# Altium PCB 2023-04-28_PIFHomework_LM2596_ThangHo_V1-01.PcbDoc
Units mil, origin at the board's own origin, x right, y up, seen from the top; angles counter-clockwise.
Board outline 1952.43 x 1244.62 mil, 2 copper layers (Top Layer, Bottom Layer); 10 components, 6 nets, 29 pads, 0 vias.
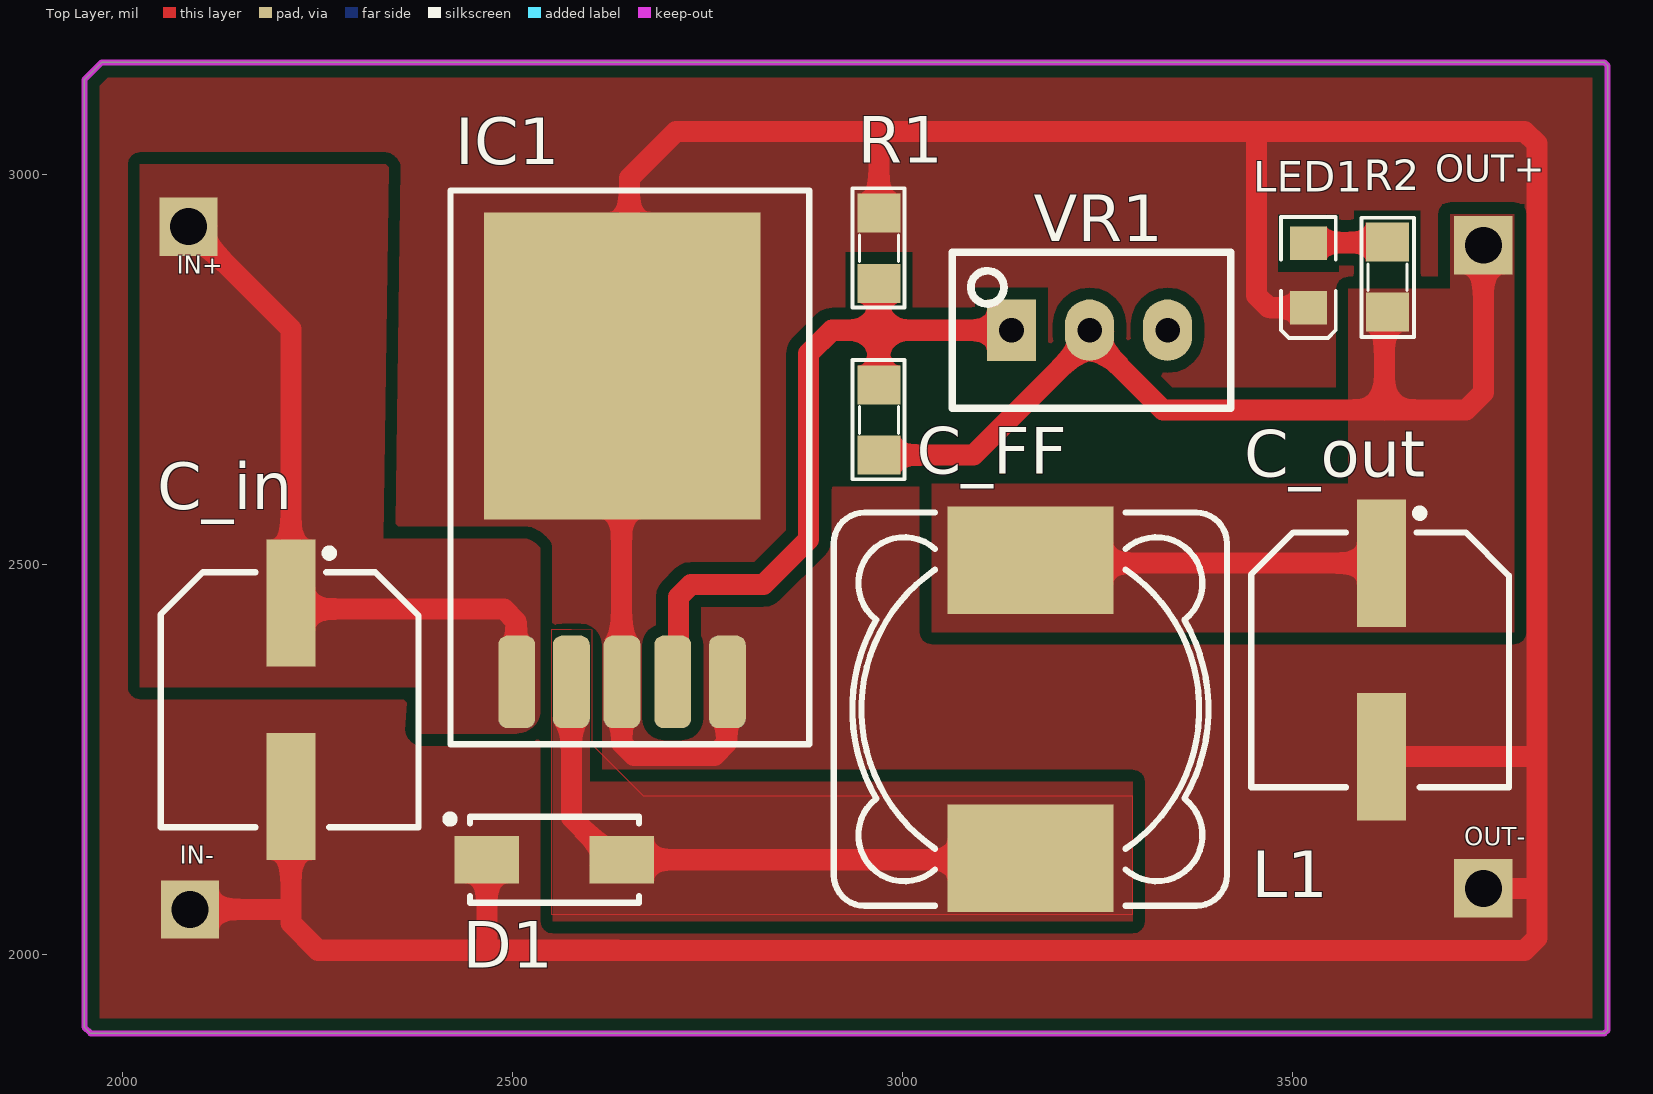
[diagram p0: Top Layer view]
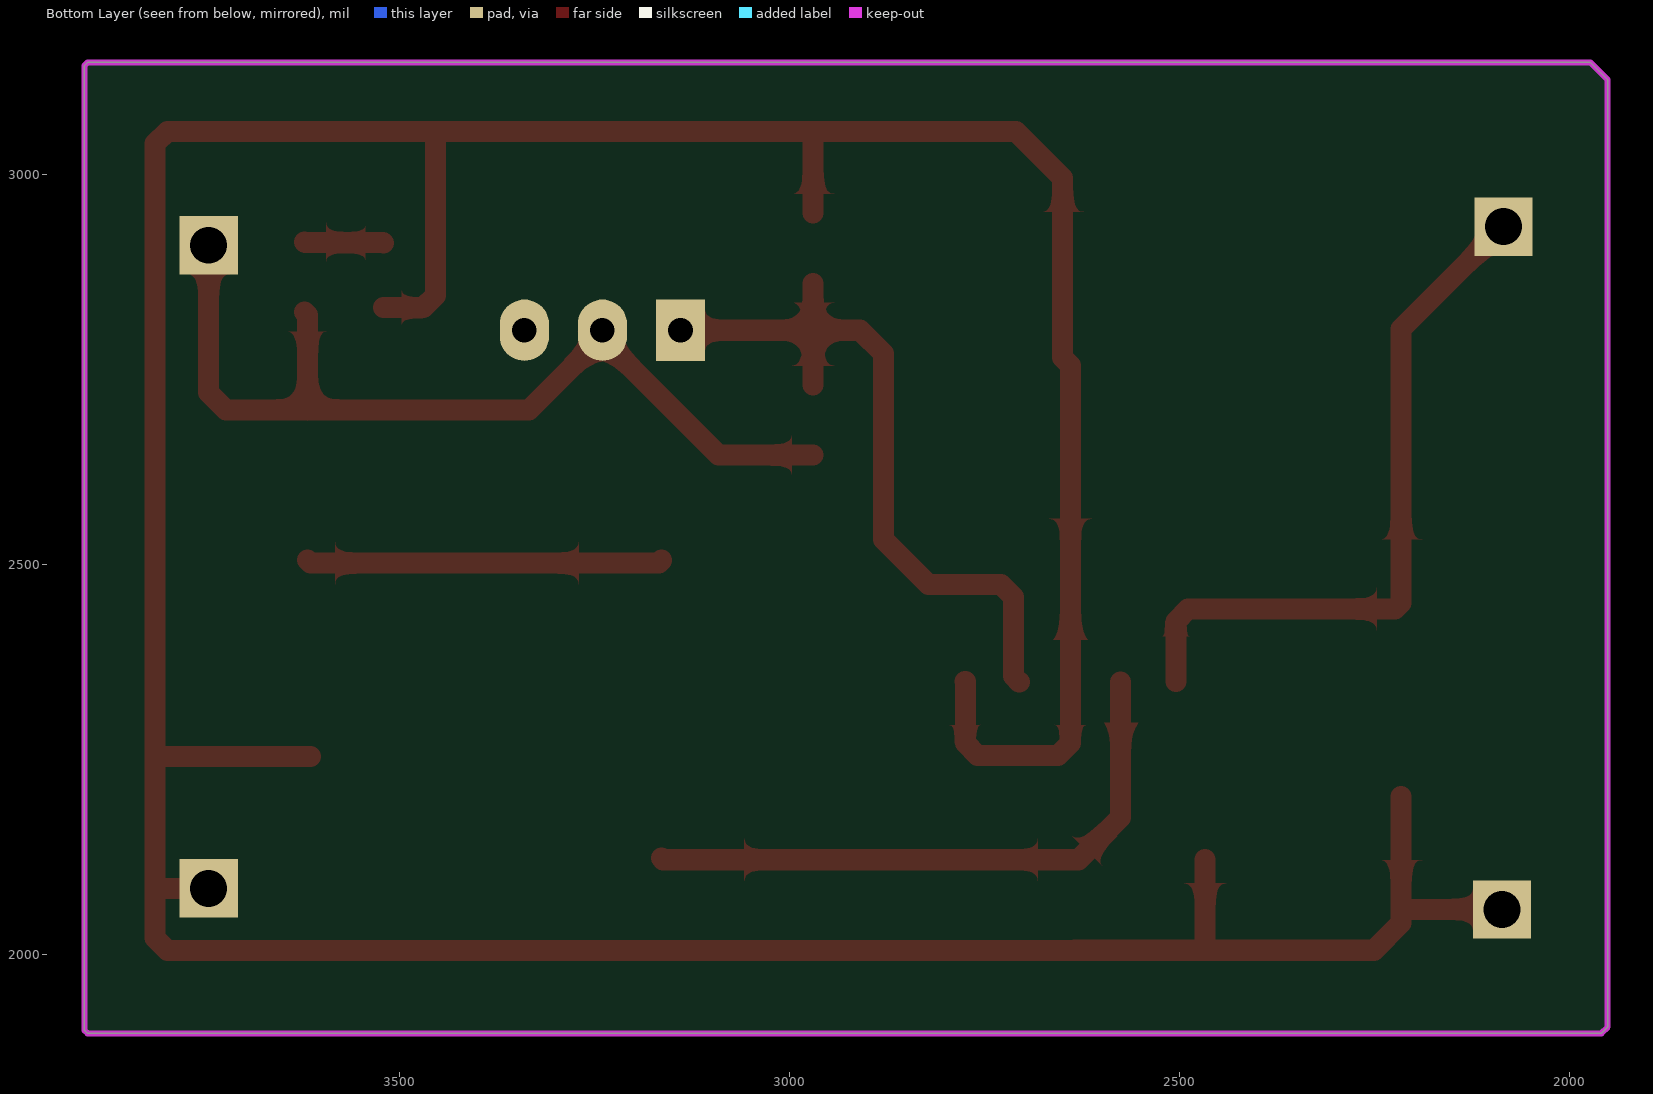
[diagram p1: Bottom Layer view, seen from below]
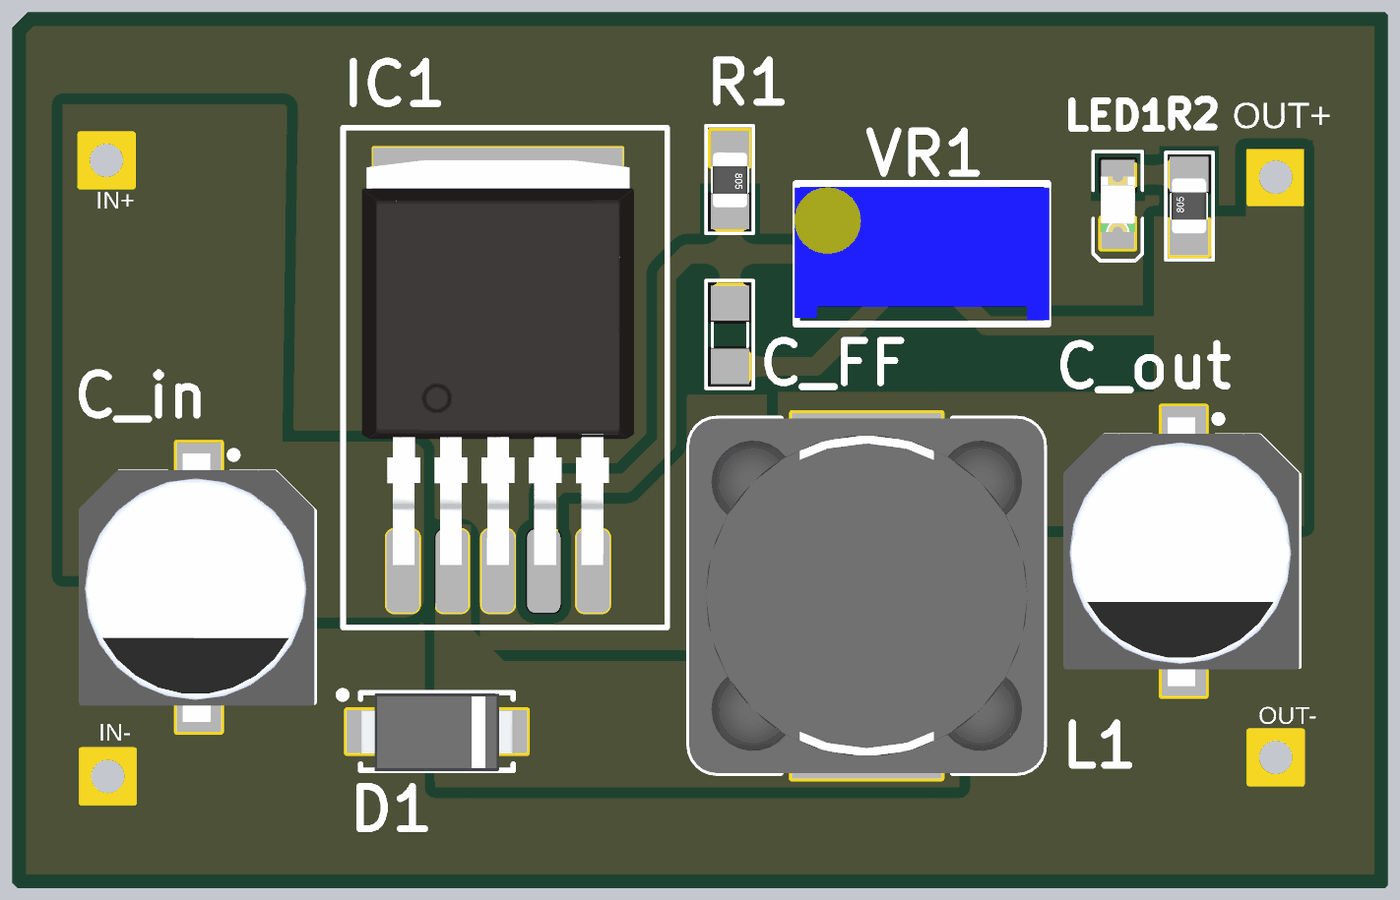
[diagram p2: 3D render of the assembled board from above, using the file's embedded part models]

## Layer stack, top to bottom
Top Solder: solder mask 0.4, Solder Resist, Dk 3.5
Top Layer: signal copper 1.4
Dielectric 1: dielectric 12.6, FR-4, Dk 4.8
Bottom Layer: signal copper 1.4
Bottom Solder: solder mask 0.4, Solder Resist, Dk 3.5

## Board outline
1951.59,1906.61 1959.55,1898.65 3900.04,1898.65 3904.02,1902.63 3904.02,3139.3 3900.05,3143.27 1973.46,3143.27 1951.59,3121.4

## Design rules (kind name [scope] priority, off if disabled: settings)
Clearance [All] p1: gap=15 ignorepadtopadclearanceinfootprint=FALSE
PolygonConnect PolygonConnect_9 [All vs IsNamedPolygon('NETD1_2_L01_P001')] p1: thpad.connectstyle=Direct thpad.reliefconductorwidth=10 thpad.reliefentries=4 thpad.polygonreliefangle="90 Angle" thpad.airgapwidth=10 smdpad.connectstyle=Direct smdpad.reliefconductorwidth=10 smdpad.reliefentries=4 smdpad.polygonreliefangle="90 Angle" smdpad.airgapwidth=10 via.connectstyle=Relief via.reliefconductorwidth=10 via.reliefentries=4 via.polygonreliefangle="90 Angle" via.airgapwidth=10
PolygonConnect PolygonConnect_8 [All vs IsNamedPolygon('NETD1_2_L01_P000')] p2: thpad.connectstyle=Direct thpad.reliefconductorwidth=10 thpad.reliefentries=4 thpad.polygonreliefangle="90 Angle" thpad.airgapwidth=10 smdpad.connectstyle=Direct smdpad.reliefconductorwidth=10 smdpad.reliefentries=4 smdpad.polygonreliefangle="90 Angle" smdpad.airgapwidth=10 via.connectstyle=Relief via.reliefconductorwidth=10 via.reliefentries=4 via.polygonreliefangle="90 Angle" via.airgapwidth=10
PolygonConnect PolygonConnect_7 [All vs IsNamedPolygon('NONET_L01_P003')] p3: thpad.connectstyle=Direct thpad.reliefconductorwidth=10 thpad.reliefentries=4 thpad.polygonreliefangle="90 Angle" thpad.airgapwidth=10 smdpad.connectstyle=Direct smdpad.reliefconductorwidth=10 smdpad.reliefentries=4 smdpad.polygonreliefangle="90 Angle" smdpad.airgapwidth=10 via.connectstyle=Relief via.reliefconductorwidth=10 via.reliefentries=4 via.polygonreliefangle="90 Angle" via.airgapwidth=10
PolygonConnect PolygonConnect_6 [All vs IsNamedPolygon('NONET_L01_P002')] p4: thpad.connectstyle=Direct thpad.reliefconductorwidth=10 thpad.reliefentries=4 thpad.polygonreliefangle="90 Angle" thpad.airgapwidth=10 smdpad.connectstyle=Direct smdpad.reliefconductorwidth=10 smdpad.reliefentries=4 smdpad.polygonreliefangle="90 Angle" smdpad.airgapwidth=10 via.connectstyle=Relief via.reliefconductorwidth=10 via.reliefentries=4 via.polygonreliefangle="90 Angle" via.airgapwidth=10
PolygonConnect PolygonConnect_5 [All vs IsNamedPolygon('NETC_FF_2_L01_P001')] p5: thpad.connectstyle=Direct thpad.reliefconductorwidth=10 thpad.reliefentries=4 thpad.polygonreliefangle="90 Angle" thpad.airgapwidth=10 smdpad.connectstyle=Direct smdpad.reliefconductorwidth=10 smdpad.reliefentries=4 smdpad.polygonreliefangle="90 Angle" smdpad.airgapwidth=10 via.connectstyle=Relief via.reliefconductorwidth=10 via.reliefentries=4 via.polygonreliefangle="90 Angle" via.airgapwidth=10
PolygonConnect PolygonConnect_4 [All vs IsNamedPolygon('NETD1_1_L01_P000')] p6: thpad.connectstyle=Direct thpad.reliefconductorwidth=10 thpad.reliefentries=4 thpad.polygonreliefangle="90 Angle" thpad.airgapwidth=10 smdpad.connectstyle=Direct smdpad.reliefconductorwidth=10 smdpad.reliefentries=4 smdpad.polygonreliefangle="90 Angle" smdpad.airgapwidth=10 via.connectstyle=Relief via.reliefconductorwidth=10 via.reliefentries=4 via.polygonreliefangle="90 Angle" via.airgapwidth=10
PolygonConnect PolygonConnect_3 [All vs IsNamedPolygon('NETD1_1_L01_P000')] p7: thpad.connectstyle=Direct thpad.reliefconductorwidth=10 thpad.reliefentries=4 thpad.polygonreliefangle="90 Angle" thpad.airgapwidth=10 smdpad.connectstyle=Direct smdpad.reliefconductorwidth=10 smdpad.reliefentries=4 smdpad.polygonreliefangle="90 Angle" smdpad.airgapwidth=10 via.connectstyle=Relief via.reliefconductorwidth=10 via.reliefentries=4 via.polygonreliefangle="90 Angle" via.airgapwidth=10
PolygonConnect PolygonConnect_2 [All vs IsNamedPolygon('NETD1_1_L01_P000')] p8: thpad.connectstyle=Direct thpad.reliefconductorwidth=10 thpad.reliefentries=4 thpad.polygonreliefangle="90 Angle" thpad.airgapwidth=10 smdpad.connectstyle=Direct smdpad.reliefconductorwidth=10 smdpad.reliefentries=4 smdpad.polygonreliefangle="90 Angle" smdpad.airgapwidth=10 via.connectstyle=Relief via.reliefconductorwidth=10 via.reliefentries=4 via.polygonreliefangle="90 Angle" via.airgapwidth=10
PolygonConnect PolygonConnect_1 [All vs IsNamedPolygon('GND_L01_P003')] p9: thpad.connectstyle=Direct thpad.reliefconductorwidth=10 thpad.reliefentries=4 thpad.polygonreliefangle="90 Angle" thpad.airgapwidth=10 smdpad.connectstyle=Direct smdpad.reliefconductorwidth=10 smdpad.reliefentries=4 smdpad.polygonreliefangle="90 Angle" smdpad.airgapwidth=10 via.connectstyle=Relief via.reliefconductorwidth=10 via.reliefentries=4 via.polygonreliefangle="90 Angle" via.airgapwidth=10
PolygonConnect [All] p10: connectstyle=Relief reliefconductorwidth=10 reliefentries=4 polygonreliefangle="90 Angle" airgapwidth=10
RoomDefinition LM2596 [InComponentClass('LM2596')] p1: confinementstyle=ConfineIn formatcopy=TRUE lockcomponents=FALSE outline 0,0 2000,0 2000,1000 0,1000
RoutingVias [All] p1: holewidth=31.5 width=59.06 viastyle="Through Hole" minholewidth=31.5 minwidth=59.06 maxholewidth=31.5 maxwidth=59.06
SolderMaskExpansion [All] p1: expansion=4 istentingtop=FALSE
Width [All] p1: maxlimit=27 minlimit=10 preferedwidth=20
30 further rules are at their usual default settings.

## Components (designator, comment, footprint, x,y, rotation, side; value= is the part's Value field where it differs from the comment)
C_FF "22nF" CAP-0805 2970,2685 r270 top
C_in "100uF" CAP-ALU 2215.63,2326.71 r270 top
C_out "220uF" CAP-ALU 3613.5,2377.9 r270 top
D1 "D Schottky" SS34 2554,2121.22 r0 top
IC1 "LM2596" LM2596 2640.75,2679.25 r0 top
L1 "68uH" INDUCTOR 3166.14,2315.19 r90 top
LED1 "" LED-0805 3520.6,2870.3 r270 top
R1 "1k" RES-SMD-0805 2970,2905 r270 top
R2 "330" RES-SMD-0805 3621.7,2868.14 r90 top
VR1 "1k" Varistor 3240,2800 r0 top

## Footprints (in the part's own frame and the unit in brackets; to place one, negate y for a bottom-side part, rotate by r counter-clockwise, add the part's x,y. Pads: shape width x height; smd on the part's side, far side on the other; paste and mask are expansions set on the pad)
CAP-0805 [mil]
  rect 50x55 smd: 1(-45,0) 2(45,0)
  silkscreen extent -77,-34 76,33, body extent -39,-25 39,25, height 31
CAP-ALU [mm]
  rect 4.15x1.6 smd: 1(-3.14,0.015) 2(3.16,0.015)
  silkscreen extent -4.89,-4.22 4.16,4.17, body extent -4.82,-4.32 4.88,4.18, height 10.5
INDUCTOR [mm]
  rect 3.5x5.4 smd: 1(-4.875,0.051) 2(4.825,0.051)
  silkscreen extent -6.43,-6.35 6.37,6.45, body extent -6.43,-6.35 6.37,6.45, height 8
LED-0805 [mm]
  rect 1.1x1.2 smd: 1(-1.05,0) 2(1.05,0)
  silkscreen extent -1.91,-0.89 2.03,0.89, body extent -1,-0.63 1,0.62, height 0.68
LM2596 [mm]
  rrect50% 1.2x3.015 smd mask+0.05: 1(-3.429,-8.382) 2(-1.651,-8.382) 3(0,-8.382) 4(1.651,-8.382) 5(3.429,-8.382)
  rect 9x10 smd mask+0.05: 3(0,1.905)
  silkscreen extent -5.59,-10.41 6.1,7.62, body extent -4.91,-8.16 4.91,6.44, height 4.22
RES-SMD-0805 [mil]
  rect 50x55 smd: 1(-45,0) 2(45,0)
  silkscreen extent -77,-34 76,33, body extent -39,-25 39,25, height 31
SS34 [mm] "DO-214-AC/SMA Molded Diode, Body 5.3x2.6mm, IPC Medium Density"
  rect 2.1x1.55 smd: 1(-2.2,0) 2(2.2,0)
  silkscreen extent -3.52,-1.4 2.75,1.45, body extent -2.75,-1.42 2.75,1.38, height 2.3
Varistor [mm]
  rect 1.6x2 hole 0.8: 1(-2.54,0)
  oval 1.6x2 hole 0.8: 2(0,0) 3(2.54,0)
  silkscreen extent -4.47,-2.54 4.6,2.54, body extent -4.54,-2.4 4.66,2.4, height 12.02

## Part data
C_FF: library part CAP-SMD-0805
C_in C_out: library part CAP-ALUM
D1: "Schottky Diode", Code_JEDEC=DO-214-AA, LatestRevisionDate=17-Jul-2002, LatestRevisionNote="Re-released for DXP Platform.", PackageDescription="DO-214-AA/SMB; 2 C-Bend Leads; Body 5.3 x 3.6 mm, inc. leads (LxW)", PackageReference=SMB, Published=8-Jun-2000, Publisher="Altium Limited"
L1: library part INDUCTOR
LED1: library part LED-0805
R1 R2: library part RES-SMD-0805
VR1: library part Varistor

## Free pads (board coordinates)
  rect 74.8x74.8 hole 47.24: 1(2084.92,2932.83) 2(2086.82,2057.52) 3(3744.79,2909.02) 4(3744.79,2084.5)

## Nets (pads, with @x,y where several pads share a name; then routed paths per layer and width w, separated by ;. In a path a pad name is that pad's centre, name@x,y a point inside that pad or via, vN(x,y) a via of type N, cw(c..) or ccw(c..) an arc to the next point about the centre after c; other vN are vias at no path point)
Feedback: C_FF.1 IC1.4 R1.2 VR1.1 | length 949.9
  Top Layer w27: IC1.4 2713.04,2356.55 2713.04,2458.2 2728.86,2474.02 2822.04,2474.02 2880,2531.98 2880,2627.5 2880,2770 2910,2800 2970,2800 ; C_FF.1 2970,2800 ; R1.2 2970,2800 ; VR1.1 2970,2800
GND: C_in.2 C_out.2 D1.1 IC1.3 IC1.5 LED1.2 pad.2 pad.4 R1.1 | length 5860.2
  Top Layer w27: pad.2 2213.92,2057.52 2216.24,2059.84 ; C_in.2 2216.24,2059.84 ; D1.1 2467.39,2006.17 2468.36,2005.2 ; 2516,2005.55 2515.65,2005.2 ; IC1.5@2775,2350 2774.85,2349.85 2774.85,2270.82 2759.04,2255 2655.96,2255 2640.15,2270.82 2640.15,2349.85 2640,2350 2640,2755 2650,2765 2650,2995 2710,3055 2975,3055 ; R1.1 2970,3050 2975,3055 ; LED1.2 3469.73,2828.96 3453.91,2844.78 3453.91,3047.31 3446.22,3055 ; C_out.2 3807.16,2253.49 3813.31,2247.34 ; pad.4 3813.31,2084.26 ; 2216.24,2059.84 2216.24,2039.95 2250.99,2005.2 2468.36,2005.2 ; 2468.36,2005.2 2515.65,2005.2 ; 2515.65,2005.2 2634.8,2005.2 2635,2005 3797.49,2005 3813.31,2020.82 3813.31,2084.26 ; 2975,3055 3340,3055 3446.22,3055 ; 3446.22,3055 3797.49,3055 3813.31,3039.18 3813.31,2247.34 ; 3813.31,2084.26 3813.31,2247.34
NetC_FF_2: C_FF.2 C_out.1 L1.2 pad.3 R2.1 VR1.2 | length 1680.1
  Top Layer w27: C_FF.2 3091.17,2640 3240,2788.83 VR1.2@3240,2792.13 ; L1.2 3167.75,2501.52 C_out.1 C_out.1@3617.91,2505.32 ; VR1.2 VR1.2@3240,2792.13 ; R2.1 3617.91,2819.34 3617.91,2697.78 ; pad.3@3736.69,2900.92 pad.3 3744.79,2720.07 3722.5,2697.78 3617.91,2697.78 ; VR1.2@3240,2792.13 3334.35,2697.78 3617.91,2697.78
NetD1_2: D1.2 IC1.2 L1.1 | length 785.6
  Top Layer w27: IC1.2 2575.75,2175.26 2629.79,2121.22 D1.2 3162.11,2121.22 L1.1
NetLED1_1: LED1.1 R2.2 | length 101.7
  Top Layer w27: LED1.1 3521.35,2912.39 3620.95,2912.39 R2.2
VCC: C_in.1 IC1.1 pad.1 | length 912.2
  Top Layer w27: pad.1 2216.24,2801.51 C_in.1 2223.94,2442.63 2489.18,2442.63 2505,2426.81 IC1.1@2505,2350
pads on no net: VR1.3

## Polygon pours and split planes (outlines as drawn)
VCC on Top Layer "VCC_L01_P003" (solid, remove dead copper, pour order 3): 2471.9,2282.97 2505.94,2282.97 ccw(c2503.41,2319.51) 2523.77,2289.06 ccw(c2506.1,2313.15) 2535.63,2308.62 2535.63,2333.94 2535.63,2369.35 2535.63,2521.25 ccw(c2504.63,2495.31) 2519.15,2533.03 2334.61,2533.03 2341.44,3012.56 2022.77,3012.56 2022.77,2342.35 2381.69,2341.64 2378.1,2282.97
GND on Top Layer "GND_L01_P005" (solid, remove dead copper, pour order 5): 1951.59,1906.61 1959.55,1898.65 3900.04,1898.65 3904.02,1902.63 3904.02,3139.3 3900.05,3143.27 1973.46,3143.27 1951.59,3121.4
NetD1_2 on Top Layer "NETD1_2_L01_P004" (solid, remove dead copper, pour order 4): 2551.83,2303.88 2551.83,2042.08 3295.58,2042.08 3295.58,2221.49 2599.52,2221.49 2599.52,2303.88
NetC_FF_2 on Top Layer "NETC_FF_2_L01_P002" (solid, remove dead copper, pour order 2): 3702.31,2853.22 3702.31,2948.97 3784.87,2948.97 3784.87,2413.05 3037.77,2413.05 3037.77,2603.43 3571.5,2603.43 3571.5,2853.22
NetD1_2 on Top Layer "NONET_L01_P000" (solid, remove dead copper, shelved, pour order 0): 2550.03,2415.93 2550.03,2051.08 3295.58,2051.08 3295.58,2202.45 2668.57,2202.45 2602.37,2268.65 2602.37,2415.37 2575.66,2415.93

## Keep-outs
Keep-Out Layer:
  the board outline again, w7.87

## Other copper
Top Layer:
  pour cut-out: 2909.97,2627.5 2927.39,2627.5 2927.39,2600 2909.97,2600 2909.97,2599.74
  pour cut-out: 3010.39,2620.71 3022.48,2620.71 3022.48,2600 3010.39,2600

## Silkscreen, mask and mechanical layers (free items; w line width, h text height)
Top Overlay:
  text "OUT+" at 3683.21,2978.69 h59.06
  text "IN+" at 2069.88,2864.44 h39.37
  text "OUT-" at 3720.09,2132.23 h39.37
  text "IN-" at 2073.7,2108.24 h39.37